# Altium PCB Copy of PCB1.PcbDoc (part 3 of 3)
Units mil, origin at the board's own origin, x right, y up, seen from the top; angles counter-clockwise.
Board outline 3937.01 x 3937.01 mil, 4 copper layers (L1, L2, L3, L4), stack 61.822 mil thick; 181 components, 253 nets, 1103 pads, 337 vias.
Unrouted connection lines stored in the file: 142.
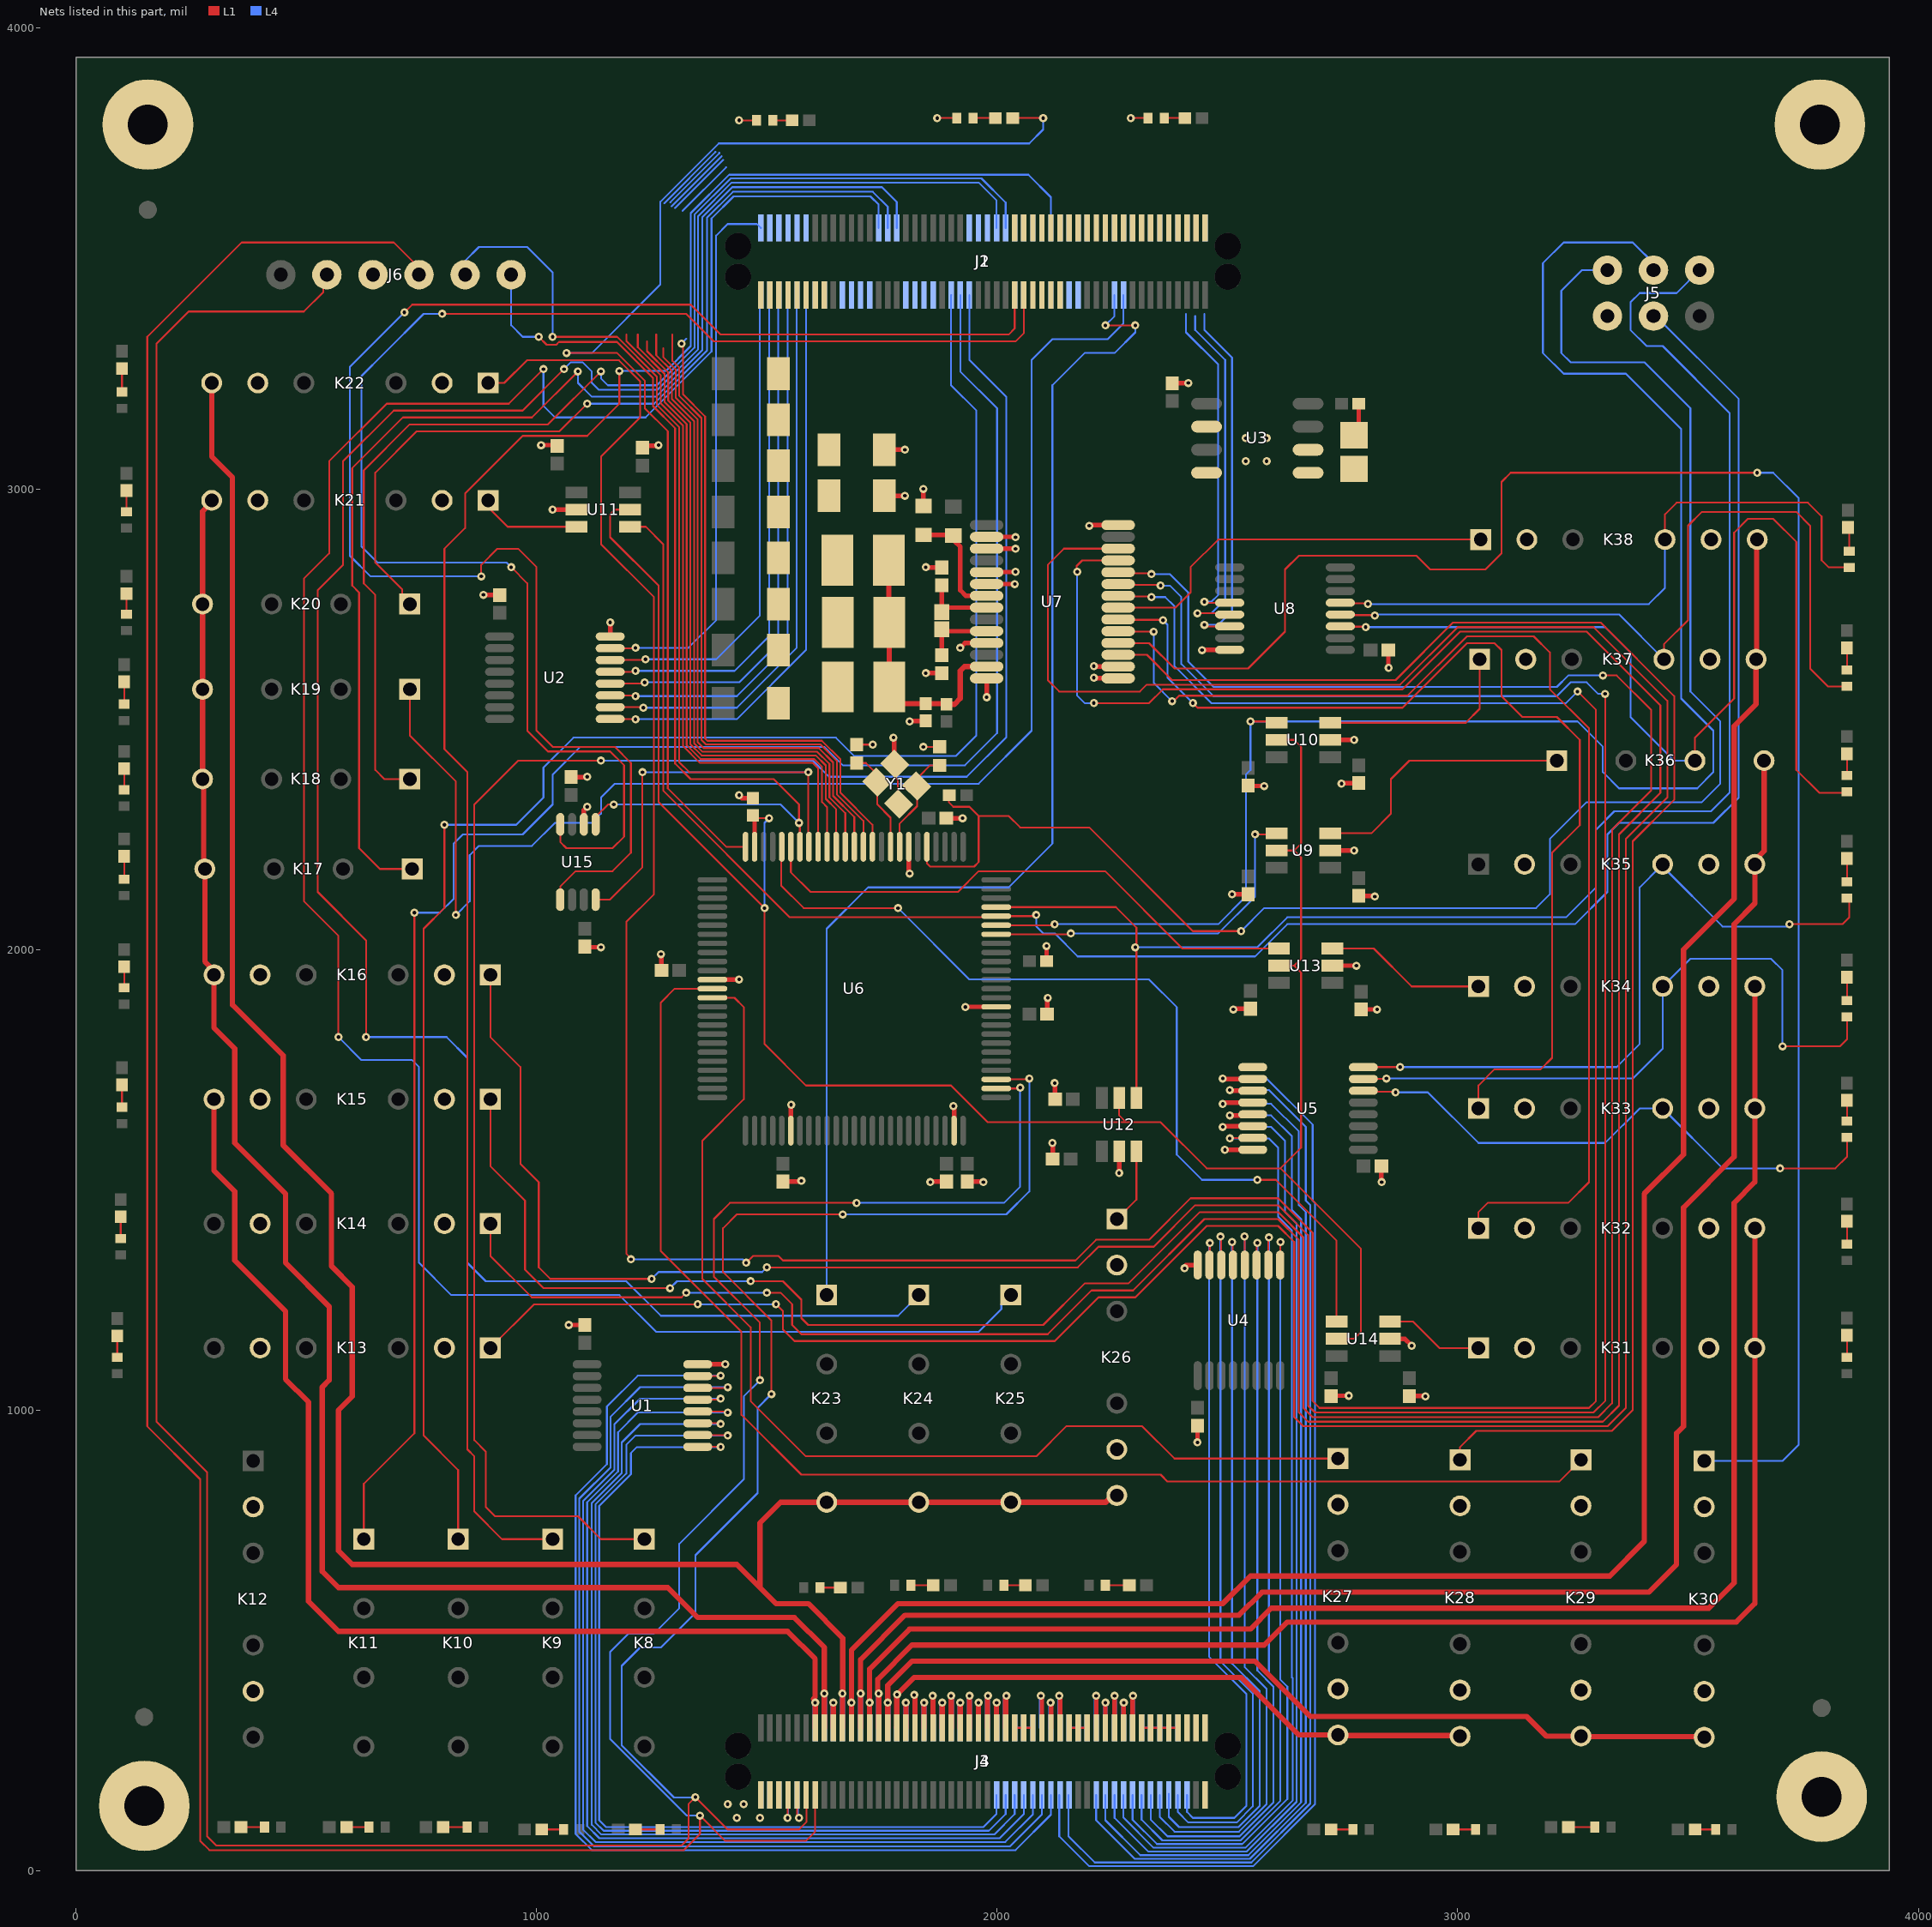
[diagram p4: the nets of this part, all layers, seen from the top]

## Via types
v1: diameter 17.72, hole 7.87, L1 to L4, 337 vias

## Nets (pads, with @x,y where several pads share a name; then routed paths per layer and width w, separated by ;. In a path a pad name is that pad's centre, name@x,y a point inside that pad or via, vN(x,y) a via of type N, cw(c..) or ccw(c..) an arc to the next point about the centre after c; other vN are vias at no path point) (continued)
COIL33: D29.1 K33.3 U5.14 | length 1234.5
  L1 w4: U5.14@2795.08,1693.39 2796.77,1691.69 2863.31,1691.69 v1(2865,1690) ; v1(3700,1525) 3820,1525 3845,1550 D29.1@3845,1592.38
  L4 w4: v1(2865,1690) 2935,1690 3045,1580 3320,1580 3395,1655 K33.3@3445,1655 3575,1525 v1(3700,1525)
COIL34: D6.1 K34.3 U5.15 | length 1467.4
  L1 w4: U5.15@2795.08,1718.98 2795.59,1719.49 2844.49,1719.49 v1(2845,1720) ; v1(3705,1790) 3830,1790 3845,1805 D6.1@3845,1853.7
  L4 w4: v1(2845,1720) 3380,1720 3445,1785 K34.3@3445,1920 3505,1980 3680,1980 3705,1955 v1(3705,1790)
COIL35: D31.1 K35.3 U5.16 | length 1552.2
  L1 w4: U5.16@2795.08,1744.57 2795.3,1744.78 2874.78,1744.78 v1(2875,1745) ; v1(3720,2055) 3835,2055 3850,2070 3850,2106.97 D31.1@3845,2111.97
  L4 w4: v1(2875,1745) 3345,1745 3395,1795 3395,2135 3440,2180 3440,2185 K35.3@3445,2185 3445,2180 3575,2050 3717.66,2050 3720,2052.34 v1(3720,2055)
COIL36: D8.1 K36.3 U8.11 | length 2297.8
  L1 w4: U8.11@2745.08,2701.61 2745.89,2700.81 2799.19,2700.81 v1(2800,2700) ; K36.3@3515,2410 3515,2460 3600,2545 3600,2905 3630,2935 3685,2935 3735,2885 3735,2390 3785,2340 3842.6,2340 D8.1@3845,2342.4
  L4 w4: v1(2800,2700) 3320,2700 3375,2645 3375,2505 3470,2410 K36.3@3515,2410
COIL37: D5.1 K37.3 U8.12 | length 1752.7
  L1 w4: U8.12@2745.08,2727.2 2746.18,2726.1 2818.9,2726.1 v1(2820,2725) ; K37.3@3447.68,2630 3447.68,2662.68 3500,2715 3500,2920 3530,2950 3735,2950 3765,2920 3765,2610 3803.92,2571.08 D5.1@3845,2571.08
  L4 w4: v1(2820,2725) 2822.68,2727.68 3350,2727.68 K37.3@3447.68,2630
COIL38: D14.1 K38.3 U8.13 | length 1404.8
  L1 w4: U8.13@2745.08,2752.8 2746.48,2751.4 2803.6,2751.4 v1(2805,2750) ; K38.3@3450,2890 3450,2945 3475,2970 3760,2970 3790,2940 3790,2845 3805.43,2829.57 D14.1@3850,2829.57
  L4 w4: v1(2805,2750) 3415,2750 3450,2785 K38.3@3450,2890
COM: J3.67 J4.68 | length 140.3
  L1 w4: v1(2135,380) v1@2136.57,378.43
  L1 w10: J3.67@2136.57,310.51 v1@2136.57,378.43
  L4 w4: v1(2135,380) v1@2135.79,379.21 ; J4.68@2135.79,311.3 J4.68@2136.57,310.51
  L4 w10: J4.68@2135.79,311.3 v1@2135.79,379.21
CS: U6.19 U9.4 | length 778.8
  L1 w4: U6.19@1998.07,2033.11 2158.11,2033.11 v1(2160,2035) ; v1(2560,2250) 2604.53,2250 U9.4@2606.93,2252.4
  L4 w4: v1(2160,2035) 2480,2035 2560,2115 v1(2560,2250)
CS1: J3.100
CS_RASP: K36.1 U9.3 | length 601.1
  L1 w4: U9.3@2723.07,2252.4 2812.4,2252.4 2855,2295 2855,2370 2895,2410 K36.1@3215,2410
D: J3.13 J4.14 K15.4 | length 2523.6
  L1 w11.55: K15.4@300,1675 300,1520 345,1475 345,1325 455,1215 455,1067.5 505,1017.5 505,585 570,520 1545,520 1604.92,460.08 1604.92,376.87 1601.53,373.47 ; v1(1605.03,365) 1605.08,364.92 J3.13@1605.08,310.51
  L4 w11.55: J4.14@1605.08,310.51 v1@1605.05,364.97
D0: K28.1 U7.3 | length 3371.1
  L1 w4: U7.3@2262.72,2639.84 2325.16,2639.84 2380,2585 2865,2585 2990,2710 3310,2710 3470,2550 3470,2325 3380,2235 3380,1000 3335,955 3040,955 3005,920 K28.1@3005,892.32
D1: K30.1 U7.4 | length 4168.3
  L1 w4: U7.4@2262.72,2665.43 2263.15,2665 2330,2665 2385,2610 2545,2610 2625,2690 2625,2825 2655,2855 2910,2855 2940,2825 3060,2825 3095,2860 3095,3015 3115,3035 v1(3650,3035)
  L4 w4: K30.1@3535,890 3705,890 3740,925 3740,2980 3685,3035 v1(3650,3035)
D2: K32.1 U7.5 | length 2625.1
  L1 w4: U7.5@2262.72,2691.02 2263.74,2690 v1(2340,2690) ; v1(2380,2539.14) 2383.34,2539.14 2395.06,2550.86 2890.86,2550.86 3020,2680 3165,2680 3200,2645 3200,2565 3285,2480 3285,1495 3240,1450 3065,1450 3045,1430 K32.1@3045,1395
  L4 w4: v1(2340,2690) 2340,2579.14 v1(2380,2539.14)
D3: K33.1 U7.6 | length 2302.3
  L1 w4: U7.6@2262.72,2716.61 2263.52,2715.81 2359.19,2715.81 v1(2360,2715) ; v1(2425,2535) 2435,2525 2880,2525 3020,2665 3080,2665 3095,2650 3095,2550 3140,2505 3215,2505 3265,2455 3265,2270 3205,2210 3205,1765 3180,1740 3080,1740 3045,1705 K33.1@3045,1655
  L4 w4: v1(2360,2715) 2370,2705 2370,2590 v1(2425,2535)
D4: K38.1 U7.7 | length 880.7
  L1 w4: U7.7@2262.72,2742.2 2387.2,2742.2 2420,2775 2420,2830 2480,2890 K38.1@3050,2890
D5: K22.1 U7.8 | length 7696.6
  L1 w4: K22.1@895,3230 930,3230 979.14,3279.14 1179.14,3279.14 1225,3233.29 1225,3155 1140,3070 1140,2880 1255,2765 1255,2120 1195,2060 1195,1340 1205,1330 v1(1205,1327.5) ; v1(1455,1320) 1470,1335 1525,1335 1535,1325 2170,1325 2215,1370 2330,1370 2420,1460 2610,1460 2685,1385 2685,1020 2700,1005 3285,1005 3300,1020 3300,2520 v1(3260,2560) ; U7.8@2262.72,2767.8 2264.11,2766.4 2333.6,2766.4 v1(2335,2765)
  L4 w4: v1(1205,1327.5) 1447.5,1327.5 v1(1455,1320) ; v1(2335,2765) 2365,2765 2385,2745 2385,2615 2465,2535 3235,2535 v1(3260,2560)
D6: K16.1 U7.9 | length 6284.4
  L1 w4: K16.1@900,1945 900,1810 965,1745 965,1535 1005,1495 1005,1310 1030,1285 v1(1250,1285) ; v1(1500,1310) 2175,1310 2220,1355 2340,1355 2430,1445 2610,1445 2675,1380 2675,1010 2690,995 3295,995 3320,1020 v1(3320,2555) ; U7.9@2262.72,2793.39 2264.41,2791.69 2353.31,2791.69 v1(2355,2790)
  L4 w4: v1(1250,1285) 1265,1300 1490,1300 v1(1500,1310) ; v1(2355,2790) 2375,2790 2400,2765 2400,2620 2470,2550 3215,2550 3245,2580 3280,2580 3305,2555 v1(3320,2555)
D7: K15.1 U7.10 | length 6291.5
  L1 w4: K15.1@900,1675 900,1530 975,1455 975,1305 1015,1265 v1(1290,1265) ; v1(1465,1280) 1535,1280 1575,1240 1575,1200 1590,1185 2100,1185 2190,1275 2285,1275 2440,1430 2610,1430 2665,1375 2665,1005 2685,985 3305,985 3335,1015 3335,2260 3420,2345 3420,2520 3345,2595 v1(3315,2595) ; U7.10@2262.72,2818.98 2264.7,2816.99 2333.01,2816.99 v1(2335,2815)
  L4 w4: v1(1290,1265) 1305,1280 v1(1465,1280) ; v1(2335,2815) 2375,2815 2415,2775 2415,2625 2470,2570 3215,2570 3240,2595 v1(3315,2595)
D8: K14.1 U7.11 | length 6482.7
  L1 w4: K14.1@900,1405 900,1335 990,1245 1315,1245 v1(1325,1255) ; v1(1500,1255) 1530,1255 1555,1230 1555,1185 1575,1165 2110,1165 2205,1260 2295,1260 2450,1415 2610,1415 2655,1370 2655,995 2675,975 3315,975 3350,1010 3350,2250 3440,2340 3440,2530 3280,2690 3005,2690 2920,2605 2880,2565 2360,2565 2330,2535 2220,2535 v1(2210,2535) ; v1(2173.86,2820) 2172.52,2821.34 2172.52,2832.52 2184.57,2844.57 U7.11@2262.72,2844.57
  L4 w4: v1(1325,1255) v1(1500,1255) ; v1(2173.86,2820) 2173.86,2551.14 2190,2535 v1(2210,2535)
D9: K13.1 U7.12 | length 6553
  L1 w4: K13.1@900,1135 995,1230 v1(1350,1230) ; v1(1520,1230) 1535,1215 1535,1175 1560,1150 2125,1150 2220,1245 2300,1245 2455,1400 2610,1400 2645,1365 2645,985 2665,965 3325,965 3365,1005 3365,2240 3455,2330 3455,2540 3295,2700 3000,2700 2875,2575 2325,2575 2310,2560 2135,2560 2110,2585 2110,2835 2145.16,2870.16 U7.12@2262.72,2870.16
  L4 w4: v1(1350,1230) v1(1520,1230)
DATA: R8.1 U6.50 | length 2752.8
  L1 w4: v1(1065,3295) 1175,3295 1235,3235 1235,3175 1285,3125 1285,2350 1411.93,2223.07 U6.50@1453.78,2223.07 ; R8.1@2035,3805 v1(2100,3805)
  L4 w4: v1(1065,3295) 1120,3295 1269,3444 1269,3623.2 1395.8,3750 2070,3750 2100,3780 v1(2100,3805)
E: J3.15 J4.16 K16.4 K17.4 K18.4 K19.4 K20.4 K21.4 | length 3861.1
  L1 w11.55: K21.4@295,2975 295,2971.37 275,2951.37 K20.4@275,2750 K19.4@275,2565 K18.4@275,2370 277.5,2367.5 277.5,2177.5 K17.4@280,2175 280,1974.13 300,1954.13 K16.4@300,1945 300,1830 345,1785 345,1580 455,1470 455,1320 550,1225 550,1065 535,1050 535,650 570,615 1285,615 1350,550 1560,550 1624.76,485.24 v1@1624.76,384.76 ; J3.15@1624.76,310.51 v1@1624.76,384.76 ; v1(1625,385) v1@1624.76,384.76
  L4 w11.55: J4.16@1624.76,310.51 1624.87,310.62 1624.87,384.87 v1(1625,385)
EXT_RX: K27.1 U6.64 | length 2392.9
  L1 w4: U6.64@1381.93,1895.31 1429.69,1895.31 1450,1875 1450,1675 1360,1585 1360,1285 1465,1180 1465,1020 1585,900 2085,900 2150,965 2315,965 2385,895 K27.1@2740,895
EXT_TX: K29.1 U6.63 | length 2994.1
  L1 w4: U6.63@1381.93,1915 1300,1915 1270,1885 1270,1345 1445,1170 1445,990 1575,860 2355,860 2370,845 3220.24,845 K29.1@3267.6,892.36
F: J3.17 J4.18 | length 109
  L1 w11.55: J3.17@1644.45,310.51 1644.45,364.45 1644.5,364.5 v1(1644.5,365)
  L4 w11.55: J4.18@1644.47,310.54 v1(1644.5,365)
G: J3.19 J4.20 K22.4 K23.4 K24.4 K25.4 K26.4 | length 5057.2
  L1 w11.55: K22.4@295,3230 295,3070 340,3025 340,1880 450,1770 450,1575 555,1470 555,1312.5 600,1267.5 600,1030 570,1000 570,695 600,665 1435,665 1485,615 ; J3.19@1664.13,310.51 1664.26,310.64 1664.13,310.77 1664.13,384.13 v1@1665,385 ; v1(1664.19,385) 1665,385.81 1665,505 1590,580 1520,580 1485,615 ; K26.4@2260,815 2250.87,815 2235.87,800 K25.4@2030,800 K24.4@1830,800 K23.4@1630,800 1530,800 1485,755 1485,615
  L4 w11.55: J4.20@1664.13,310.51 1664.24,310.62 1664.24,384.95 v1(1664.19,385)
GND: C1.1 C2.1 C3.1 C4.1 C5.1 C6.1 C7.1 C8.1 C9.1 C10.1 C11.1 C12.1 C13.1 C15.1 C16.1 C17.1 C18.1 C19.1 C20.1 C21.1 C22.1 C23.1 C24.1 C25.1 C26.1 C27.1 C28.1 C29.1 C30.1 C31.1 C32.1 D1.1 D2.1 D3.1 J1.62 J1.64 J1.66 J1.68 J2.33 J2.35 J2.37 J2.39 J3.2 J3.4 J3.6 J3.69 J3.71 J3.73 J3.85 J3.87 J3.89 J3.91 J3.93 J4.1 J4.3 J4.5 J4.70 J4.72 J4.74 J4.86 J4.88 J4.90 J4.92 J4.94 J5.6 J6.3 K12.5 K12.6 K13.5 K13.6 K14.5 K14.6 K15.5 K15.6 K16.5 K16.6 K21.5 K21.6 K22.5 K22.6 K26.5 K26.6 K27.5 K27.6 K28.5 K28.6 K29.5 K29.6 K30.5 K30.6 K31.5 K31.6 K32.5 K32.6 K33.5 K33.6 K34.5 K34.6 K35.5 K35.6 K37.5 K37.6 K38.5 K38.6 MH1.1 MH2.1 MH3.1 MH4.1 R4.1 R5.1 R6.1 R50.1 R51.1 R52.1 U1.8 U2.8 U3.2 U3.4 U3.5 U3.6 U4.8 U5.8 U6.11 U6.32 U6.62 U6.81 U6.99 U7.1 U7.2 U7.14 U7.16 U7.17 U7.19 U7.20 U7.25 U7.28 U8.8 U9.2 U10.2 U11.2 U12.2 U13.2 U14.2 U15.2 Y1.2 Y1.4 | length 3189.2
  L1 w4: C2.1@919.29,2770 C2.1@920,2769.29 ; C24.1@1043.58,3095 C24.1@1045,3093.58 ; C31.1@1105,2006.42 C31.1@1106.42,2005 ; v1@1109.29,2374.29 v1(1110,2375) ; v1(1160,2710) v1@1160.08,2709.92 ; v1(1270,1990) v1@1271.42,1988.58 ; v1@1409.57,1099.57 v1(1410,1100) ; v1(1440,2335) 1446.3,2328.7 ; v1(1440,3800) D1.1@1477.38,3800 ; v1@1552.2,1662.2 v1(1552.8,1662.8) ; v1@1573.58,1496.42 v1(1575,1497.83) ; C26.1@1695,2445.08 1695.08,2445 v1(1730,2445) ; v1(1775,2460) v1@1776.28,2458.72 ; Y1.2@1776.28,2403.72 Y1.2@1777.67,2402.33 1777.67,2374.53 1784.63,2367.57 1784.63,2317.42 Y1.4@1786.03,2316.03 ; v1@1808.11,2166.89 v1(1810,2165) ; v1(1810,2495) v1@1811.3,2496.3 ; v1(1840,2440) 1875,2440 C25.1@1875,2440.08 ; v1(1845,2830) v1@1845.71,2829.29 ; v1(1855,1495) v1@1856.42,1496.42 ; v1(1870,3805) D2.1@1912.38,3805 ; v1(1905,1660) v1@1906.54,1658.46 ; v1(1931.26,1875) v1@1931.89,1875.63 ; v1@1968.58,1496.42 v1(1970,1495) ; U7.19@1977.28,2818.98 1978.31,2820 U7.19@1978.82,2819.49 ; v1@2039.25,2895.75 v1(2040,2895) ; v1@2039.49,2819.49 v1(2040,2820) ; v1@2039.84,2870.16 v1(2040,2870) ; v1@2108.58,1893.58 v1(2110,1895) ; v1(2120,1580) v1@2120.71,1579.29 ; v1(2125,1710) v1@2125.71,1709.29 ; J3.69@2156.26,310.51 J3.71@2175.94,310.51 J3.73@2195.63,310.51 ; v1(2200,2920) v1@2201.34,2921.34 ; v1(2210,2590) v1@2210.67,2589.33 ; v1(2210,2615) v1@2210.75,2614.25 ; U7.1@2260.71,2589.33 2261.38,2590 U7.1@2262.72,2588.66 ; v1(2290,3805) D3.1@2327.38,3805 ; J3.85@2313.74,310.51 J3.87@2333.43,310.51 J3.89@2353.11,310.51 J3.91@2372.8,310.51 J3.93@2392.48,310.51 ; v1(2407.14,1308.01) 2409.77,1310.64 2409.77,1314.77 v1@2410,1315 ; v1@2414.29,3229.29 v1(2415,3230) ; v1(2445,2650) v1@2445.43,2650.43 ; v1(2512.83,1870) v1@2514.25,1871.42 ; C28.1@2545,2355.71 C28.1@2545.71,2355 ; v1(2747.83,2360) v1@2749.25,2361.42 ; v1@2818.58,2116.42 v1(2820,2115) ; v1@2834.29,1495.71 v1(2835,1495) ; v1@2849.29,2612.13 v1(2850,2611.42) ; v1@2929.29,1030.71 v1(2930,1030)
  L1 w10: v1(885,2770) C2.1@919.29,2770 ; v1(1010,3095) C24.1@1043.58,3095 ; v1(1035,2955) U11.2@1086.93,2955 ; v1(1070,1185) C1.1@1105,1185 ; C32.1@1075,2374.29 v1@1109.29,2374.29 ; U15.2@1102.8,2271.69 1102.8,2302.8 v1(1110,2310) ; C31.1@1106.42,2005 v1(1140,2005) ; U2.8@1160.08,2679.57 v1@1160.08,2709.92 ; 1245,3093.58 1263.58,3093.58 v1(1265,3095) ; C5.1@1271.42,1955 v1@1271.42,1988.58 ; U1.8@1350.08,1099.57 v1@1409.57,1099.57 ; U6.62@1381.93,1934.68 1439.68,1934.68 v1(1440,1935) ; 1446.3,2328.7 R5.1@1470,2328.7 ; C4.1@1535,1496.42 v1@1573.58,1496.42 ; U6.81@1552.2,1606.93 v1@1552.2,1662.2 ; R50.1@1755.08,2985 v1(1800,2985) ; R51.1@1755.08,3085 v1(1800,3085) ; Y1.2@1776.28,2403.72 v1@1776.28,2458.72 ; v1@1808.11,2166.89 U6.32@1808.11,2223.07 ; v1@1811.3,2496.3 R52.1@1845,2496.3 ; R4.1@1840,2962.99 v1(1840,3000) ; v1(1845,2600) C15.1@1880,2600 ; v1@1845.71,2829.29 C16.1@1880,2829.29 ; v1@1856.42,1496.42 C6.1@1890,1496.42 ; C9.1@1890,2285 v1(1925,2285) ; U6.99@1906.54,1606.93 v1@1906.54,1658.46 ; v1(1920,2655) 1930.43,2665.43 U7.25@1977.28,2665.43 ; v1@1931.89,1875.63 U6.11@1998.07,1875.63 ; C7.1@1935,1496.42 v1@1968.58,1496.42 ; v1(1977.28,2547.72) U7.28@1977.28,2588.66 ; U7.20@1977.28,2793.39 v1(2038.39,2793.39) ; U7.17@1977.28,2870.16 v1@2039.84,2870.16 ; U7.16@1977.28,2895.75 v1@2039.25,2895.75 ; U7.19@1978.82,2819.49 v1@2039.49,2819.49 ; R6.1@2107.4,1975 v1(2107.4,2007.6) ; C8.1@2108.58,1860 v1@2108.58,1893.58 ; C23.1@2120.71,1545 v1@2120.71,1579.29 ; C22.1@2125.71,1675 v1@2125.71,1709.29 ; v1@2201.34,2921.34 U7.14@2262.72,2921.34 ; v1@2210.67,2589.33 U7.1@2260.71,2589.33 ; v1@2210.75,2614.25 U7.2@2262.72,2614.25 ; v1(2265,1515) U12.2@2265,1561.93 ; C3.1@2380,3229.29 v1@2414.29,3229.29 ; v1@2410,1315 2410.08,1315.08 U4.8@2435.43,1315.08 ; v1(2435,930) C11.1@2435,966.42 ; v1@2445.43,2650.43 U8.8@2504.92,2650.43 ; v1(2494.57,1565.43) U5.8@2554.92,1565.43 ; v1(2510,2120) C27.1@2545,2120 ; v1@2514.25,1871.42 C18.1@2550,1871.42 ; C28.1@2545.71,2355 v1(2580,2355) ; U9.2@2723.07,2215 v1(2775,2215) ; U10.2@2723.07,2455 v1(2775,2455) ; U13.2@2728.07,1965 v1(2780,1965) ; C17.1@2738.58,1031.42 v1(2763.58,1031.42) ; v1@2749.25,2361.42 C29.1@2785,2361.42 ; C19.1@2785,2116.42 v1@2818.58,2116.42 ; C20.1@2790,1870 v1(2825,1870) ; v1@2834.29,1495.71 C12.1@2834.29,1530 ; v1@2849.29,2612.13 C13.1@2849.29,2650 ; U14.2@2853.07,1155 2885,1155 v1(2900,1140) ; C30.1@2895,1030.71 v1@2929.29,1030.71
  L4 w4: J4.70@2156.26,310.51 J4.72@2175.94,310.51 J4.74@2195.63,310.51 ; J4.86@2313.74,310.51 J4.88@2333.43,310.51 J4.90@2353.11,310.51 J4.92@2372.8,310.51 J4.94@2392.48,310.51
  other v1: 1435,115 1485,115 1415,145 1450,145 2540,3060 2585,3060 2540,3110 2585,3110
GPIO7: J2.13
GPIO8: J2.15
GPIO9: J2.63
GPIO10: J2.19
GPIO11: J2.21
GPIO12: J2.23
GPIO13: J2.25
GPIO15: J2.4
GPIO16: J2.6
GPIO17: J2.8
GPIO18: J2.10
GPIO19: J2.12
GPIO20: J2.48
GPIO21: J2.50
GPIO22: J2.52
GPIO23: J2.58
GPIO24: J2.60
GPIO25: J2.62
GPIO26: J2.64
GPIO35: J2.84
GPIO37: J2.88
GPIO38: J1.57 J2.90
GPIO39: J1.59 J2.92
GPIO40: J1.61 J2.94
GPIO41: J1.63 J2.96
GPIO42: J1.65
GPIO43: J1.67 J2.100
GPIO44: J1.69 J2.65
GPIO45: J1.71 J2.67
GPIO46: J1.73 J2.69
GPIO47: J1.75 J2.71
GPIO48: J1.77
GPIO49: J1.79
GPIO50: J1.81
GPIO51: J1.83
GPIO52: J1.85
GPIO53: J1.87
GPIO54: J1.89
GPIO55: J1.91
GPIO56: J1.93
GPIO57: J1.95
GPIO58: J1.97
GPIO59: J1.99
GPIO60: J1.2
GPIO61: J1.4
GPIO62: J1.6
GPIO63: J1.8
GPIO64: J1.10
GPIO65: J1.12
GPIO66: J1.14
GPIO67: J1.16
H: J3.21 J4.22 K37.4 K38.4 | length 4318.3
  L1 w11.55: J3.21@1683.82,310.51 1683.82,364.95 v1(1683.87,365) 1683.87,478.87 1785,580 2490,580 2550,640 3330,640 3405,715 3405,1470 3490,1555 3490,2000 3600,2110 3600,2485 3647.68,2532.68 K37.4@3647.68,2630 3648.84,2631.16 3648.84,2888.84 K38.4@3650,2890
  L4 w11.55: J4.22@1683.82,310.51 v1@1683.84,364.97
I: J3.23 J4.24 K35.4 K36.4 | length 3903.2
  L1 w11.55: J3.23@1703.5,310.51 v1(1703.5,385) 1703.5,458.5 1800,555 2525,555 2575,605 3415,605 3475,665 3475,950 3490,965 3490,1440 3600,1550 3600,2055 3645,2100 K35.4@3645,2185 3645,2194.13 3665,2214.13 K36.4@3665,2410
  L4 w11.55: J4.24@1703.5,310.51 v1(1703.5,385)
J: J3.25 J4.26 K33.4 K34.4 | length 3450.1
  L1 w11.55: J3.25@1723.19,310.51 1723.19,361.81 1723.14,361.86 v1(1723.14,365) 1723.14,438.14 1810,525 2550,525 2595,570 3545,570 3600,625 3600,1450 3645,1495 K33.4@3645,1655 K34.4@3645,1920
  L4 w11.55: J4.26@1723.19,310.51 v1@1723.16,364.97
K: J3.27 J4.28 K31.4 K32.4 | length 2968.8
  L1 w11.55: v1@1740.75,385 1742.87,382.87 J3.27@1742.87,310.51 ; v1(1742.77,385) 1740.75,387.02 1740.75,415.75 1815,490 2580,490 2630,540 3605,540 3645,580 K31.4@3645,1135 K32.4@3645,1395
  L4 w11.55: v1(1742.77,385) 1742.87,384.9 J4.28@1742.87,310.51
L: J3.29 J4.30 K29.4 K30.4 | length 2009.1
  L1 w11.55: J3.29@1762.56,310.51 1762.56,364.95 v1(1762.51,365) 1762.51,402.51 1815,455 2560,455 2680,335 3150,335 3192.64,292.36 K29.4@3267.6,292.36 3268.78,291.18 3533.82,291.18 K30.4@3535,290
  L4 w11.55: J4.30@1762.53,310.54 v1(1762.51,365)
M: J3.31 J4.32 K27.4 K28.4 | length 1435.5
  L1 w11.55: J3.31@1782.24,310.51 1782.24,382.24 v1(1782.76,382.76) 1820,420 2530,420 2655,295 K27.4@2740,295 2741.34,293.66 3003.66,293.66 K28.4@3005,292.32
  L4 w11.55: J4.32@1782.24,310.51 1782.37,310.64 1782.37,382.37 v1(1782.76,382.76)
MISO: J3.95 J5.1 U6.22 U12.4 | length 3547.9
  L1 w4: U6.22@1998.07,2092.17 2257.83,2092.17 2302.4,2047.6 U12.4@2302.4,1678.07
  L4 w4: v1(2300,2005) 2565,2005 2630,2070 3235,2070 3300,2135 3300,2260 3340,2300 3550,2300 3590,2340 3590,3165 3445,3310 3410,3310 3375,3345 3375,3405 3395,3425 3475,3425 J5.1@3525,3475
MISO_RASP: K26.1 U12.3 | length 164.5
  L1 w4: K26.1@2260,1415 2302.4,1457.4 U12.3@2302.4,1561.93
MOSI: J3.97 J5.4 U6.21 U11.4 | length 4453.5
  L1 w4: U11.4@1203.07,2917.6 1237.4,2917.6 1275,2880 1275,2345 1550,2070 U6.21@1995,2070 ; U6.21@1998.07,2072.48 2082.48,2072.48 v1(2085,2075)
  L4 w4: v1(2085,2075) 2085,2050 2100,2035 2125,2035 2175,1985 2560,1985 2630,2055 3255,2055 3325,2125 3325,2250 3350,2275 3555,2275 3610,2330 3610,3195 J5.4@3432.5,3372.5
MOSI_RASP: K21.1 U11.3 | length 224.5
  L1 w4: K21.1@895,2975 895,2960 937.4,2917.6 U11.3@1086.93,2917.6
N: J3.33 J4.34 | length 109
  L1 w11.55: J3.33@1801.93,310.51 1801.93,364.92 v1(1802.01,365)
  L4 w11.55: J4.34@1801.93,310.51 1801.97,310.55 v1(1802.01,365) v1(1802.01,365)
NET1: J2.32 K17.1 | length 2698.8
  L1 w4: K17.1@730,2175 660,2175 615,2220 615,2775 600,2790 600,3045 710,3155 990,3155 v1(1090,3255)
  L4 w4: v1(1090,3255) 1090,3230 1120,3200 1258.94,3200 1360,3301.06 1360,3589.75 1425.25,3655 1750,3655 1782.24,3622.76 J2.32@1782.24,3566.42
NET2: J2.56 K18.1 | length 2679.3
  L1 w4: K18.1@725,2370 670,2370 650,2390 650,2770 625,2795 625,3040 725,3140 1025,3140 v1(1140,3255)
  L4 w4: v1(1140,3255) 1140,3240 1155,3225 1261.31,3225 1343,3306.69 1343,3595.37 1421.63,3674 1966,3674 2018.46,3621.54 J2.56@2018.46,3566.42
NET3: J2.54 K24.1 | length 5023.6
  L1 w4: v1(630,1810) 630,2020 525,2125 525,2780 580,2835 580,3060 690,3170 970,3170 v1(1060,3260)
  L4 w4: v1(630,1810) 805,1810 850,1765 850,1320 890,1280 1195,1280 1270,1205 1785,1205 K24.1@1830,1250 ; v1@1060.9,3260.9 1075,3275 1100,3275 1120,3255 1120,3230 1135,3215 1262.63,3215 1351,3303.37 1351,3592.06 1423.94,3665 1960,3665 1998.78,3626.22 J2.54@1998.78,3566.42
NET4: J2.30 K20.1 | length 1909.9
  L1 w4: K20.1@725,2750 708.7,2766.3 708.7,2781.3 650,2840 650,3035 740,3125 1050,3125 v1(1110,3185)
  L4 w4: v1(1110,3185) 1255.25,3185 1370,3299.75 1370,3588.43 1426.57,3645 1730,3645 1762.56,3612.44 J2.30@1762.56,3566.42
NET5: J2.28 K25.1 | length 5109
  L1 w4: v1(570,1810) 570,2030 495,2105 495,2805 550,2860 550,3060 675,3185 940,3185 v1(1015,3260)
  L4 w4: v1(570,1810) 620,1760 730,1760 745,1745 745,1320 815,1250 1180,1250 1260,1170 1960,1170 2009.36,1219.36 2009.36,1229.36 K25.1@2030,1250 ; v1(1015,3260) 1015,3180 1040,3155 1236.57,3155 1380,3298.43 1380,3587.12 1427.88,3635 1725,3635 1742.87,3617.13 J2.28@1742.87,3566.42
NET6: J2.81 K19.1 | length 3124.8
  L1 w4: K19.1@725,2565 725,2465 825,2365 v1(825,2075)
  L4 w4: v1(825,2075) 855,2105 855,2205 875,2225 990,2225 1040,2275 1120,2275 1140,2295 1140,2330 1170,2360 1960,2360 2075,2475 2075,3280 2120,3325 2240,3325 2274.37,3359.37 J2.81@2274.37,3420.75
NET7: J2.79 K23.1 | length 2738.2
  L1 w4: v1(2235,3355) v1(2300,3355)
  L4 w4: K23.1@1630,1250 1630,2045 1720,2135 2025,2135 2120,2230 2120,3225 2190,3295 2255,3295 2300,3340 v1(2300,3355) ; v1(2235,3355) 2254.69,3374.69 J2.79@2254.69,3420.75
NetC10_2: C10.2 R1.1 | length 72.7
  L1 w4: C10.2@2775,3116.42 C10.2@2785,3126.42
  L1 w10: C10.2@2785,3126.42 R1.1@2785,3185
NetC14_1: C14.1 C16.2 U7.22 | length 159.1
  L1 w4: C14.1@1880,2732.8 C14.1@1889.41,2742.2
  L1 w10: C14.1@1880,2732.8 C16.2@1880,2790.71 ; C14.1@1889.41,2742.2 U7.22@1977.28,2742.2
NetC14_2: C14.2 C15.2 U7.24 | length 155.3
  L1 w4: C14.2@1880,2695 C14.2@1883.98,2691.02
  L1 w10: C15.2@1880,2638.58 C14.2@1880,2695 ; C14.2@1883.98,2691.02 U7.24@1977.28,2691.02
NetC25_2: C25.2 U6.33 Y1.1 | length 234.4
  L1 w4: U6.33@1788.43,2223.07 1788.43,2273.43 1826.39,2311.39 1826.39,2353.61 Y1.1@1825,2355 1825,2380 1828.56,2376.44 1831.35,2376.44 1854.83,2399.92 C25.2@1875,2399.92
NetC26_2: C26.2 U6.34 Y1.3 | length 227.1
  L1 w4: C26.2@1695,2404.92 1715.17,2404.92 1733.79,2386.3 1738.7,2386.3 Y1.3@1738.7,2363.35 1740.09,2361.96 1740.09,2314.91 1768.74,2286.26 U6.34@1768.74,2223.07
NetC33_1: C33.1 C34.1 C35.1 R41.1 R42.1 R43.1 R44.1 R45.1 R46.1 R47.1 R48.1 R50.2 R51.2
NetD1_2: D1.2 R7.2 | length 42.2
  L1 w4: D1.2@1512.82,3800 R7.2@1555,3800
NetD2_2: D2.2 R8.2 | length 48.5
  L1 w4: D2.2@1947.82,3805 R8.2@1996.3,3805
NetD3_2: D3.2 R9.2 | length 44.8
  L1 w4: D3.2@2362.82,3805 R9.2@2407.6,3805
NetD4_2: D4.2 R10.2 | length 45.9
  L1 w4: D4.2@110,2950.43 R10.2@110,2996.3
NetD5_2: D5.2 R11.2 | length 48.5
  L1 w4: D5.2@3845,2606.52 R11.2@3845,2655
NetD6_2: D6.2 R12.2 | length 50.9
  L1 w4: D6.2@3845,1889.13 R12.2@3845,1940
NetD7_2: D7.2 R13.2 | length 52.2
  L1 w4: D7.2@2235,620 R13.2@2287.17,620
NetD8_2: D8.2 R14.2 | length 47.2
  L1 w4: D8.2@3845,2377.83 R14.2@3845,2425
NetD9_2: D9.2 R15.2 | length 47.6
  L1 w4: D9.2@3845,1115 R15.2@3845,1162.6
NetD10_2: D10.2 R16.2 | length 52.2
  L1 w4: R16.2@797.4,95 D10.2@849.59,95
NetD11_2: D11.2 R17.2 | length 48.5
  L1 w4: R17.2@587.72,95 D11.2@636.2,95
NetD12_2: D12.2 R18.2 | length 48.5
  L1 w4: R18.2@2990,90 D12.2@3038.48,90
NetD13_2: D13.2 R19.2 | length 47.2
  L1 w4: R19.2@2725,90 D13.2@2772.18,90
NetD14_2: D14.2 R20.2 | length 52.4
  L1 w4: R20.2@3847.32,2916.3 3850,2913.62 D14.2@3850,2865
NetD15_2: D15.2 R21.2 | length 47.2
  L1 w4: D15.2@97.32,1372.82 R21.2@97.32,1420
NetD16_2: D16.2 R22.2 | length 57.2
  L1 w4: R22.2@3240,95 D16.2@3297.18,95
NetD17_2: D17.2 R23.2 | length 47.2
  L1 w4: R23.2@1011.42,90 D17.2@1058.58,90
NetD18_2: D18.2 R24.2 | length 53.5
  L1 w4: R24.2@1215,90 D18.2@1268.48,90
NetD19_2: D19.2 R25.2 | length 44.6
  L1 w4: R25.2@3515.43,90 D19.2@3560,90
NetD20_2: D20.2 R26.2 | length 46.3
  L1 w4: D20.2@90,1115 R26.2@90,1161.3
NetD21_2: D21.2 R27.2 | length 50.9
  L1 w4: D21.2@100,3210.43 R27.2@100,3261.3
NetD22_2: D22.2 R28.2 | length 49.8
  L1 w4: D22.2@105,2152.82 R28.2@105,2202.6
NetD23_2: D23.2 R29.2 | length 46.3
  L1 w4: D23.2@2015,620 R29.2@2061.3,620
NetD24_2: D24.2 R30.2 | length 49.6
  L1 w4: D24.2@3845,1360.43 R30.2@3845,1410
NetD25_2: D25.2 R31.2 | length 50.9
  L1 w4: R31.2@358.7,95 D25.2@409.57,95
NetD26_2: D26.2 R32.2 | length 45.9
  L1 w4: D26.2@105,1916.73 R32.2@105,1962.6
NetD27_2: D27.2 R33.2 | length 48.5
  L1 w4: D27.2@105,2532.82 R33.2@105,2581.3
NetD28_2: D28.2 R34.2 | length 45.9
  L1 w4: D28.2@105,2346.73 R34.2@105,2392.6
NetD29_2: D29.2 R35.2 | length 44.8
  L1 w4: D29.2@3845,1627.82 R35.2@3845,1672.6
NetD30_2: D30.2 R36.2 | length 48.5
  L1 w4: D30.2@100,1657.82 R36.2@100,1706.3
NetD31_2: D31.2 R37.2 | length 50.2
  L1 w4: D31.2@3845,2147.4 R37.2@3845,2197.6
NetD32_2: D32.2 R38.2 | length 44.6
  L1 w4: D32.2@1615.43,615 R38.2@1660,615
NetD33_2: D33.2 R39.2 | length 48.5
  L1 w4: D33.2@1812.82,620 R39.2@1861.3,620
NetD34_2: D34.2 R49.2 | length 44.8
  L1 w4: D34.2@110,2727.82 R49.2@110,2772.6
NetR3_1: R3.1 R4.2 U7.21 | length 248.6
  L1 w4: R3.1@1903.5,2900 R3.1@1905,2898.5 1906.97,2898.5 R3.1@1906.97,2897.4
  L1 w10: R4.2@1840,2900 R3.1@1893.5,2900 ; R3.1@1896.97,2897.4 1898.08,2897.4 1907.72,2887.76 1907.72,2886.65 1920,2874.36 1920,2780 1932.2,2767.8 U7.21@1977.28,2767.8
O: J3.35 J4.36 | length 143.8
  L1 w11.55: v1(1820,381.72) 1821.64,380.08 1821.64,356.87 ; J3.35@1821.61,310.51 1821.61,356.84
  L4 w11.55: v1(1820,381.72) 1820,380.05 1821.64,378.41 J4.36@1821.61,310.51
OE: R5.2 U6.49 U9.5 U10.5 U11.5 U12.5 U13.5 U14.5 | length 4507.9
  L1 w4: U11.5@1203.07,2955 1170,2955 1160,2945 1160,2895 1265,2790 1265,2320 v1(1495,2090) 1495,1795 1585,1705 1900,1705 1980,1625 2280,1625 ; R5.2@1470,2290 R5.2@1473.46,2286.54 ; R5.2@1470,2291.3 1476.3,2285 v1(1505,2285) ; U12.5@2265,1678.07 2265,1640 2280,1625 ; U9.5@2606.93,2215 2645,2215 ; U10.5@2606.93,2455 2645,2455 2660,2440 2660,2230 2645,2215 ; U13.5@2611.93,1965 2645,1965 ; U14.5@2736.93,1155 2775,1155 2790,1170 2790,1350 2615,1525 ; 2280,1625 2355,1625 2455,1525 2615,1525 ; 2615,1525 2660,1570 2660,1950 2645,1965 ; 2645,1965 2660,1980 2660,2200 2645,2215
  L1 w10: U6.49@1473.46,2223.07 R5.2@1473.46,2286.54
  L4 w4: v1(1495,2090) 1495,2275 v1(1505,2285)
P: J3.37 J4.38 | length 109
  L1 w11.55: v1@1841.27,363.73 v1(1841.27,365) ; J3.37@1841.3,310.51 v1@1841.3,363.7
  L4 w11.55: J4.38@1841.3,310.51 v1(1841.27,365)
Q: J3.39 J4.40 | length 139.8
  L1 w11.55: v1(1860,380) 1860.98,379.02 J3.39@1860.98,310.51
  L4 w11.55: v1(1860,380) 1860.91,379.09 1860.91,310.59 J4.40@1860.98,310.51
R: J3.41 J4.42 | length 109
  L1 w11.55: v1(1880.62,365) 1880.62,364.38 1880.67,364.33 J3.41@1880.67,310.51
  L4 w11.55: J4.42@1880.64,310.54 v1(1880.62,365)
RASP_SCL: J1.58 J2.57 U15.5 | length 3489.8
  L1 w4: v1(713.11,3383.11) 730,3400 1335,3400 1400,3335 2025,3335 2038.15,3348.15 J1.58@2038.15,3420.75 ; v1(880,2810) 880,2835 915,2870 960,2870 1000,2830 1000,2475 1035,2440 1170,2440 1205,2405 1205,2210 1165,2170 1085,2170 1051.61,2136.61 U15.5@1051.61,2108.31
  L4 w4: v1(713.11,3383.11) 595,3265 595,2855 640,2810 v1(880,2810)
RASP_SDA: J1.60 J2.59 U15.4 | length 3280.7
  L1 w4: v1(795,3380) 1325,3380 1385,3320 2040,3320 2057.83,3337.83 J1.60@2057.83,3420.75 ; v1(945,2830) 980,2795 980,2475 1025,2430 1160,2430 1190,2400 1190,2245 1165,2220 1065,2220 1051.61,2233.39 U15.4@1051.61,2271.69
  L4 w4: v1(795,3380) 755,3380 670,3295 620,3245 620,2875 655,2840 935,2840 v1(945,2830)
RELAY8: J4.95 U4.7 | length 1486.7
  L1 w4: U4.7@2461.02,1315.08 2461.54,1315.6 2461.54,1362.41 v1(2462.07,1362.93)
  L4 w4: J4.95@2412.17,164.84 2412.17,127.83 2425,115 2515,115 2541.13,141.13 2541.13,383.87 2460,465 2460,1360.87 v1(2462.07,1362.93)
RELAY9: J4.53 U1.1 | length 1998
  L1 w4: U1.1@1350.08,920.43 1399.57,920.43 v1(1400,920)
  L4 w4: v1(1400,920) 1218,920 1205,907 1205,861.06 1136,792.06 1136,110 1151,95 1970,95 1998.78,123.78 J4.53@1998.78,164.84
RELAY10: J4.55 U1.2 | length 2095.8
  L1 w4: U1.2@1350.08,946.02 1413.98,946.02 v1(1415,945)
  L4 w4: v1(1415,945) 1215,945 1195,925 1195,862.37 1128,795.37 1128,105 1146,87 1982,87 2018.46,123.46 J4.55@2018.46,164.84
RELAY11: J4.57 U1.3 | length 2125.9
  L1 w4: U1.3@1350.08,971.61 1398.39,971.61 v1(1400,970)
  L4 w4: v1(1400,970) 1225,970 1185,930 1185,863.69 1120,798.69 1120,100 1141,79 1994,79 2038.15,123.15 J4.57@2038.15,164.84
RELAY12: J4.59 U1.4 | length 2226.5
  L1 w4: U1.4@1350.08,997.2 1412.8,997.2 v1(1415,995)
  L4 w4: v1(1415,995) 1220,995 1177,952 1177,867 1110,800 1110,97.34 1136.66,70.69 2005.69,70.69 2057.83,122.83 J4.59@2057.83,164.84
RELAY13: J4.61 U1.5 | length 2267.1
  L1 w4: U1.5@1350.08,1022.8 1397.8,1022.8 v1(1400,1025)
  L4 w4: v1(1400,1025) 1225,1025 1169,969 1169,870.31 1101,802.31 1101,90 1128.31,62.69 2017.69,62.69 2077.52,122.52 J4.61@2077.52,164.84
RELAY14: J4.63 U1.6 | length 2364
  L1 w4: U1.6@1350.08,1048.39 1413.39,1048.39 v1(1415,1050)
  L4 w4: v1(1415,1050) 1225,1050 1161,986 1161,876 1093,808 1093,85 1125,53 2028,53 2097.2,122.2 J4.63@2097.2,164.84
RELAY15: J4.65 U1.7 | length 2402.9
  L1 w4: U1.7@1350.08,1073.98 1351.1,1075 1351.61,1074.49 1399.49,1074.49 v1(1400,1075)
  L4 w4: v1(1400,1075) 1220,1075 1153,1008 1153,883 1085,815 1085,80 1120,45 2040,45 2116.89,121.89 J4.65@2116.89,164.84
RELAY16: J2.11 U2.1 | length 1258
  L1 w4: U2.1@1160.08,2500.43 1214.57,2500.43 v1(1215,2500)
  L4 w4: v1(1215,2500) 1435,2500 1585,2650 J2.11@1585,3420.75
RELAY17: J2.9 U2.2 | length 1224.9
  L1 w4: U2.2@1160.08,2526.02 1231.02,2526.02 v1(1232.05,2525)
  L4 w4: v1(1232.05,2525) 1435,2525 1565,2655 J2.9@1565,3420.75
RELAY18: J2.7 U2.3 | length 1191.9
  L1 w4: U2.3@1160.08,2551.61 1213.39,2551.61 v1(1215,2550)
  L4 w4: v1(1215,2550) 1435,2550 1545,2660 J2.7@1545,3420.75
RELAY19: J2.5 U2.4 | length 1157
  L1 w4: U2.4@1160.08,2577.2 1232.2,2577.2 v1(1235,2580)
  L4 w4: v1(1235,2580) 1440,2580 1525,2665 J2.5@1525,3420.75
RELAY20: J2.3 U2.5 | length 1117.6
  L1 w4: U2.5@1160.08,2602.8 1212.8,2602.8 v1(1215,2605)
  L4 w4: v1(1215,2605) 1430,2605 1505,2680 J2.3@1505,3420.75
RELAY21: J2.1 U2.6 | length 1060.7
  L1 w4: U2.6@1160.08,2628.39 1235.16,2628.39 v1(1236.77,2630)
  L4 w4: v1(1236.77,2630) 1390,2630 1485,2725 J2.1@1485,3420.75
RELAY22: J2.2 U2.7 | length 1201.1
  L1 w4: U2.7@1160.08,2653.98 1213.98,2653.98 v1(1215,2655)
  L4 w4: v1(1215,2655) 1330,2655 1390,2715 1390,3550 1415,3575 1478.39,3575 J2.2@1486.97,3566.42
RELAY23: J4.87 U4.3 | length 1643.4
  L1 w4: U4.3@2563.39,1315.08 2563.39,1361.61 v1(2565,1363.23)
  L4 w4: J4.87@2333.43,164.84 2333.43,111.57 2370,75 2526.31,75 2600,148.69 2600,400 2565,435 v1(2565,1363.23)
RELAY24: J4.89 U4.4 | length 1632.3
  L1 w4: v1(2537.2,1377.2) 2537.8,1376.61 U4.4@2537.8,1315.08
  L4 w4: J4.89@2353.11,164.84 2353.11,116.89 2385,85 2525,85 2585,145 2585,395 2537.2,442.8 v1(2537.2,1377.2)
RELAY25: J4.91 U4.5 | length 1576.6
  L1 w4: v1(2510,1365) 2511.1,1363.9 2511.1,1318.39 2510,1317.28 U4.5@2512.2,1315.08
  L4 w4: J4.91@2372.8,167.9 2372.8,117.21 2395,95 2523.69,95 2570,141.31 2570,390 2510,450 v1(2510,1365)
RELAY26: J4.93 U4.6 | length 1551.8
  L1 w4: v1(2485,1376.77) 2486.61,1375.16 U4.6@2486.61,1315.08
  L4 w4: J4.93@2392.48,164.84 2392.48,127.52 2415,105 2520,105 2555,140 2555,385 2485,455 v1(2485,1376.77)
RELAY27: J4.85 U4.2 | length 1702.6
  L1 w4: U4.2@2588.98,1315.08 2588.98,1373.98 v1(2590,1375)
  L4 w4: J4.85@2313.74,164.84 2313.74,111.26 2358.88,66.12 2528.75,66.12 2615,152.37 2615,400 2590,425 v1(2590,1375)
RELAY28: J4.83 U4.1 | length 1717.5
  L1 w4: U4.1@2614.57,1315.08 2614.57,1364.57 v1(2615,1365)
  L4 w4: J4.83@2294.06,164.84 2294.06,110.94 2346.88,58.12 2532.06,58.12 2630,156.06 2630,400 2615,415 v1(2615,1365)
RELAY29: J4.81 U5.7 | length 2080.3
  L1 w4: v1(2505,1590) 2506.02,1591.02 U5.7@2554.92,1591.02
  L4 w4: J4.81@2274.37,164.84 2274.37,115.63 2339.88,50.12 2538.81,50.12 2642,153.31 2642,418 2640,420 2640,1390 2610,1420 2610,1570 2590,1590 v1(2505,1590)
RELAY30: J4.79 U5.6 | length 2178.1
  L1 w4: v1(2490,1615) v1@2491.61,1616.61
  L1 w10: v1@2491.61,1616.61 U5.6@2554.92,1616.61
  L4 w4: J4.79@2255,164.84 2255,115 2327.88,42.12 2542.12,42.12 2650,150 2650,1405 2625,1430 2625,1585 2595,1615 v1(2490,1615)
RELAY31: J4.77 U5.5 | length 2217.8
  L1 w4: U5.5@2552.72,1640 U5.5@2554.92,1642.2
  L1 w10: v1(2505,1640) U5.5@2552.72,1640
  L4 w4: J4.77@2235,164.84 2235,110 2310.88,34.12 2545.44,34.12 2660,148.69 2660,1415 2640,1435 2640,1595 2595,1640 v1(2505,1640)
RELAY32: J4.75 U5.4 | length 2314.6
  L1 w4: v1(2490,1665) v1@2492.8,1667.8
  L1 w10: v1@2492.8,1667.8 U5.4@2554.92,1667.8
  L4 w4: J4.75@2215,164.84 2215,110 2298.88,26.12 2548.75,26.12 2670,147.37 2670,1430 2655,1445 2655,1605 2595,1665 v1(2490,1665)
RELAY33: J4.69 U5.3 | length 2413.2
  L1 w4: v1(2505,1695) v1@2506.61,1693.39
  L1 w10: v1@2506.61,1693.39 U5.3@2554.92,1693.39
  L4 w4: J4.69@2155,164.84 2155,75 2211.88,18.12 2552.06,18.12 2680,146.06 2680,1445 2670,1455 2670,1615 2590,1695 v1(2505,1695)
RELAY34: J4.67 U5.2 | length 2506.6
  L1 w4: v1(2490,1720) v1@2491.02,1718.98
  L1 w10: v1@2491.02,1718.98 U5.2@2554.92,1718.98
  L4 w4: J4.67@2135,164.84 2135,75 2199.88,10.12 2555.38,10.12 2690,144.75 2690,1450 2685,1455 2685,1620 2585,1720 v1(2490,1720)
RELAY35: U5.1
RELAY36: U8.6 | length 798.6
  L1 w4: v1(2450,2705) 2453.39,2701.61 U8.6@2504.92,2701.61
  L4 w4: v1(2450,2705) 2480,2705 2510,2735 2510,3285 2450,3345 2450,3380
RELAY37: U8.5 | length 785.4
  L1 w4: v1(2435,2730) 2502.13,2730 U8.5@2504.92,2727.2
  L4 w4: 2430,3375 2430,3345 2495,3280 2495,2760 2465,2730 v1(2435,2730)
RELAY38: U8.4 | length 731
  L1 w4: v1(2450,2755) 2452.2,2752.8 U8.4@2504.92,2752.8
  L4 w4: 2410,3380 2410,3340 2480,3270 2480,2770 2465,2755 v1(2450,2755)
RESET: J5.5 R2.1 U6.30 | length 3690
  L1 w4: U6.30@1847.48,2223.07 1847.48,2187.52 1855,2180 1950,2180 1960,2190 1960,2290 ; R2.1@1896.3,2335 1895,2333.7 1895,2320 1905,2310 1940,2310 1960,2290 ; v1(2530,2040) 2425,2040 2200,2265 2050,2265 2025,2290 1960,2290
  L4 w4: v1(2530,2040) 2580,2090 3170,2090 3200,2120 3200,2240 3280,2320 3530,2320 3570,2360 3570,2495 3505,2560 3505,3175 3405,3275 3245,3275 3225,3295 3225,3430 3270,3475 J5.5@3325,3475
S: J3.43 J4.44 | length 139.3
  L1 w11.55: v1(1900,380) 1900.35,379.65 J3.43@1900.35,310.51
  L4 w11.55: v1(1900,380) 1900.25,379.75 1900.25,310.62 J4.44@1900.35,310.51
SCK: J3.99 J5.3 U6.20 U10.4 | length 3743.3
  L1 w4: U6.20@1998.07,2052.8 2122.8,2052.8 v1(2125,2055) ; v1(2550,2495) 2604.33,2495 U10.4@2606.93,2492.4
  L4 w4: v1(2125,2055) 2480,2055 2540,2115 2540,2380 2550,2390 v1(2550,2495) 3260,2495 3315,2440 3315,2385 3350,2350 3520,2350 3555,2385 3555,2475 3485,2545 3485,3130 3365,3250 3230,3250 3185,3295 3185,3490 3230,3535 3380,3535 J5.3@3430,3485
SCK_RASP: K37.1 U10.3 | length 444.5
  L1 w4: U10.3@2723.07,2492.4 3017.4,2492.4 3047.68,2522.68 K37.1@3047.68,2630
SCL: J3.8 J4.7 | length 100.5
  L1 w4: v1(1545,115) 1545.51,115.51 1545.51,164.33 J3.8@1546.02,164.84
  L4 w4: v1(1545,115) 1546.02,116.02 J4.7@1546.02,164.84
SDA: J3.10 J4.9 | length 103.2
  L1 w4: J3.10@1565.71,164.84 1565.71,119.29 v1(1570,115)
  L4 w4: J4.9@1565.71,164.84 1567.85,162.7 1567.85,117.15 v1(1570,115)
SEL0: J2.82 U6.42 | length 1585.5
  L1 w4: 1195,3335 1195,3321.31 1270,3246.31 1270,3185.25 1318,3137.25 1318,2573 1318,2442 1355,2405 1600,2405 1611.26,2393.74 U6.42@1611.26,2223.07
  L4 w4: 1277,3619.88 1388.44,3731.32
SEL1: J2.80 U6.41 | length 1578.2
  L1 w4: 1220,3335 1220,3307.63 1278,3249.63 1278,3188.57 1326,3140.57 1326,2444 1356.66,2413.34 1602.97,2413.34 1620,2396.31 1620,2320 1630.94,2309.06 U6.41@1630.94,2223.07
  L4 w4: 1290.66,3622.23 1396.85,3728.42 1396.85,3730
SEL2: J2.78 U6.40 | length 1565.9
  L1 w4: 1240,3320 1240,3315 1240,3298.94 1286,3252.94 1286,3191.88 1334,3143.88 1334,2446 1358.66,2421.34 1606.28,2421.34 1628,2399.63 1628,2327 1650.63,2304.37 U6.40@1650.63,2223.07
  L4 w4: 1293,3613.25 1401.75,3722
SEL3: J2.74 U6.39 | length 1574.9
  L1 w4: 1260,3335 1260,3290.25 1294,3256.25 1294,3195.2 1342,3147.2 1342,2448 1360.66,2429.34 1609.6,2429.34 1636,2402.94 1636,2330.31 1670.32,2296 U6.39@1670.32,2223.07
  L4 w4: 1301,3609.94 1405.06,3714
SEL4: J2.72 U6.38 | length 1400.4
  L1 w4: 1275,3305 1275,3286.57 1302,3259.57 1302,3198.51 1350,3150.51 1350,2450 1362.66,2437.34 1612.91,2437.34 1644,2406.25 1644,2333.63 1690,2287.63 U6.38@1690,2223.07
SEL5: J2.70 U6.37 | length 1563.2
  L1 w4: 1295,3335 1295,3277.88 1310,3262.88 1310,3201.82 1358,3153.82 1358,2455 1367.66,2445.34 1616.23,2445.34 1652,2409.57 1652,2336.94 1709.69,2279.26 U6.37@1709.69,2223.07
  L4 w4: 1317,3603.31 1411.69,3698
SEL6: J2.68 U6.36 | length 1426.6
  L1 w4: v1(1315,3315) 1318,3312 1318,3205.14 1366,3157.14 1366,2458.31 1370.97,2453.34 1619.54,2453.34 1660,2412.88 1660,2340.25 1729.37,2270.88 U6.36@1729.37,2223.07
  L4 w4: v1(1315,3315) 1315,3316.01 1325,3326.01 ; J2.68@2135,3567.99 J2.68@2136.57,3566.42
SLAVE_RX: U6.45 U13.4 | length 1220.8
  L1 w4: U6.45@1552.2,2223.07 1552.2,2167.8 1595,2125 1915,2125 1960,2170 2234.74,2170 2402.34,2002.4 U13.4@2611.93,2002.4
SLAVE_RX_RASP: K34.1 U13.3 | length 351.1
  L1 w4: U13.3@2728.07,2002.4 2817.6,2002.4 2900,1920 K34.1@3045,1920
SLAVE_SCL: J6.5 U6.43 U15.8 | length 2663.2
  L1 w4: v1(1035,3330) 1175,3330 1261,3244 1261,3182.94 1310,3133.94 1310,2406.31 1331.31,2385 v1(1590,2385) 1590,2224.65 U6.43@1591.57,2223.07 ; U15.8@1128.39,2108.31 1159.49,2108.31 1230,2178.82 v1(1230,2385)
  L4 w4: J6.5@845,3465 845,3495 875,3525 980,3525 1035,3470 v1(1035,3330) ; v1(1230,2385) v1(1590,2385)
SLAVE_SDA: J6.6 U6.44 U15.1 | length 2211.2
  L1 w4: v1(1005,3330) 1022,3313 1043,3313 1048.86,3318.86 1174.83,3318.86 1253,3240.69 1253,3179.63 1301,3131.63 1301,2404 1335,2370 1515,2370 1570,2315 v1(1570,2275) 1571.89,2273.11 U6.44@1571.89,2223.07 ; U15.1@1128.39,2271.69 1128.39,2288.39 1128.86,2288.39 1155.47,2315 v1(1167.74,2315)
  L4 w4: J6.6@945,3465 945,3355 970,3330 v1(1005,3330) ; v1(1167.74,2315) 1530,2315 v1(1570,2275)
SLAVE_TX: U6.46 U14.4 | length 1972.9
  L1 w4: U6.46@1532.52,2223.07 1531.26,2221.81 1531.26,2138.74 1580,2090 v1(1785,2090) ; v1(2565,1500) 2605,1500 2736.93,1368.07 U14.4@2736.93,1192.4
  L4 w4: v1(1785,2090) 1940,1935 2330,1935 2390,1875 2390,1555 2445,1500 v1(2565,1500)
SLAVE_TX_RASP: K31.1 U14.3 | length 215.7
  L1 w4: U14.3@2853.07,1192.4 2902.6,1192.4 2960,1135 K31.1@3045,1135
T: J3.45 J4.46 | length 109
  L1 w11.55: v1(1920,365) v1(1920,365) J3.45@1920.04,310.51
  L4 w11.55: J4.46@1920.04,310.51 v1(1920,365)
U: J3.47 J4.48 | length 139.2
  L1 w11.55: J3.47@1939.72,310.51 1939.72,379.72 v1(1940,380)
  L4 w11.55: J4.48@1939.72,310.51 1939.83,310.62 1939.83,379.83 v1(1940,380)
VETB_RX: J3.14 J6.4 U6.2 | length 8096.5
  L1 w4: J6.4@745,3465 745,3480 690,3535 360,3535 155,3330 155,965 270,850 270,65 290,45 1320,45 1355,80 v1(1355,120) 1410,65 1585,65 1605.08,85.08 J3.14@1605.08,164.84 ; v1(1485,1065) 1485,1190 1385,1290 1385,1415 1420,1450 v1(1695,1450) ; U6.2@1998.07,1698.46 2048.46,1698.46 v1(2050,1700)
  L4 w4: v1(1355,120) 1326.26,120 1160,286.26 1160,475 1200,515 1255,515 1310,570 1310,710 1450,850 1450,1030 v1(1485,1065) ; v1(1695,1450) 2015,1450 2050,1485 v1(2050,1700)
VETB_TX: J3.12 J6.2 U6.3 | length 7776.7
  L1 w4: J6.2@545,3465 537.11,3457.11 537.11,3427.11 495,3385 245,3385 175,3315 175,975 285,865 285,75 305,55 1315,55 1330,70 1330,145 v1(1345,160) 1415,90 1570,90 1585.86,105.86 1585.86,164.38 J3.12@1585.39,164.84 ; v1(1510,1035) 1510,1195 1405,1300 1405,1395 1435,1425 v1(1665,1425) ; U6.3@1998.07,1718.15 2068.15,1718.15 v1(2070,1720)
  L4 w4: v1(1345,160) 1344.14,159.14 1298.43,159.14 1185,272.57 1185,445 1225,485 1270,485 1345,560 1345,685 1480,820 1480,1005 v1(1510,1035) ; v1(1665,1425) 2020,1425 2070,1475 v1(2070,1720)
VIN1: C33.2 C34.2 C35.2 R40.1 R52.2 U7.27 | length 573.5
  L1 w4: C34.2@1765,2711.1 C34.2@1766.1,2710 ; C33.2@1766.1,2570 1766.1,2566.15 C33.2@1798.55,2533.7 ; R40.1@1888.7,2533.7 R40.1@1890,2532.4
  L1 w11.55: C34.2@1765,2711.1 C35.2@1765,2845 ; C33.2@1766.1,2570 C34.2@1766.1,2710 ; C33.2@1798.55,2533.7 R52.2@1845,2533.7 R40.1@1888.7,2533.7 ; R40.1@1890,2532.4 1907.4,2532.4 1920,2545 1920,2605 1929.25,2614.25 U7.27@1977.28,2614.25
VOUT1: J2.43 K10.1 | length 3885.9
  L1 w4: v1(800,2270.93) 800,2090 755,2045 755,945 830,870 K10.1@830,720
  L4 w4: v1(800,2270.93) 955.92,2270.93 1015,2330 1015,2395 1080,2460 1650,2460 1690,2420 1910,2420 1955,2465 1955,3170 1900,3225 1900,3420.39 J2.43@1900.35,3420.75
VOUT2: J2.45 K11.1 | length 3957.5
  L1 w4: K11.1@625,720 625,840 735,950 v1(735,2080)
  L4 w4: v1(735,2080) 790,2080 820,2110 820,2230 840,2250 970,2250 1035,2315 1035,2380 1095,2440 1625,2440 1665,2400 1930,2400 2000,2470 2000,3175 1920.04,3254.96 J2.45@1920.04,3420.75
VOUT3: J2.47 K8.1 | length 4145.9
  L1 w4: v1(1140,2410) 960,2410 865,2315 865,935 890,910 890,790 910,770 1090,770 1140,720 K8.1@1234.02,720
  L4 w4: v1(1140,2410) 1600,2410 1635,2375 1934.03,2375 2020,2460.97 2020,3200 1939.72,3280.28 J2.47@1939.72,3420.75
VOUT4: J2.66 K9.1 | length 4306.5
  L1 w4: K9.1@1035,720 925,720 865,780 865,900 850,915 850,2385 800,2435 800,2870 845,2915 845,2990 970,3115 1110,3115 1180,3185 v1(1180,3255.86)
  L4 w4: v1(1180,3255.86) 1280.86,3255.86 1335,3310 1335,3598.69 1418.31,3682 2068,3682 2116.89,3633.11 J2.66@2116.89,3566.42
W: J3.49 J4.50 | length 109
  L1 w11.55: J3.49@1959.41,310.51 1959.41,364.41 1959.46,364.46 v1(1959.46,365)
  L4 w11.55: J4.50@1959.41,310.51 v1@1959.44,364.97
X: J3.51 J4.52 | length 139.7
  L1 w11.55: J3.51@1979.09,310.51 1979.09,379.09 v1(1980,380)
  L4 w11.55: J4.52@1979.09,310.51 1979.2,310.62 1979.2,379.2 v1(1980,380)
X1: J3.57 J3.59 J3.61 J4.58 J4.60 J4.62 | length 78.7
  L1 w4: J3.57@2038.15,310.51 J3.59@2057.83,310.51 J3.61@2077.52,310.51
  L4 w4: J4.58@2038.15,310.51 J4.60@2057.83,310.51 J4.62@2077.52,310.51
X2: J3.63 J4.64 | length 140.8
  L1 w4: v1(2095,380) v1@2097.2,377.8
  L1 w10: J3.63@2097.2,310.51 v1@2097.2,377.8
  L4 w10: v1(2095,380) 2096.1,378.9 2096.1,311.61 J4.64@2097.2,310.51
X3: J3.65 J4.66 | length 109.7
  L1 w4: v1(2116.06,365) 2116.06,363.94 v1@2116.89,363.11
  L1 w10: J3.65@2116.89,310.51 v1@2116.89,363.11
  L4 w4: v1(2116.06,365) v1@2116.48,364.59 ; J4.66@2116.48,310.93 J4.66@2116.89,310.51
  L4 w10: J4.66@2116.48,310.93 v1@2116.48,364.59
X4: J3.75 J4.76 | length 139.2
  L1 w4: v1(2215,380) v1@2215.32,379.69
  L1 w10: J3.75@2215.32,310.51 v1@2215.32,379.69
  L4 w4: v1(2215,380) v1@2215.16,379.84 ; J4.76@2215.16,310.67 J4.76@2215.32,310.51
  L4 w10: J4.76@2215.16,310.67 v1@2215.16,379.84
X5: J3.77 J4.78 | length 109
  L1 w10: J3.77@2235,310.51 v1(2235,365)
  L4 w10: J4.78@2235,310.51 v1(2235,365)
X6: J3.79 J4.80 | length 139.2
  L1 w4: v1@2254.69,379.69 v1(2255,380)
  L1 w10: J3.79@2254.69,310.51 v1@2254.69,379.69
  L4 w4: J4.80@2254.69,310.51 J4.80@2254.84,310.67 ; v1@2254.84,379.84 v1(2255,380)
  L4 w10: J4.80@2254.84,310.67 v1@2254.84,379.84
X7: J3.81 J4.82 | length 109.5
  L1 w4: v1@2274.37,364.37 v1(2275,365)
  L1 w10: J3.81@2274.37,310.51 v1@2274.37,364.37
  L4 w4: J4.82@2274.37,310.51 J4.82@2274.68,310.83 ; v1@2274.68,364.69 v1(2275,365)
  L4 w10: J4.82@2274.68,310.83 v1@2274.68,364.69
X8: J3.83 J4.84 | length 139.8
  L1 w4: v1@2294.06,379.06 v1(2295,380)
  L1 w10: J3.83@2294.06,310.51 v1@2294.06,379.06
  L4 w4: J4.84@2294.06,310.51 J4.84@2294.53,310.98 ; v1@2294.53,379.53 v1(2295,380)
  L4 w10: J4.84@2294.53,310.98 v1@2294.53,379.53
Y: J3.53 J4.54 | length 109
  L1 w11.55: J3.53@1998.78,310.51 1998.78,364.95 v1(1998.83,365)
  L4 w11.55: J4.54@1998.78,310.51 v1(1998.83,365)
Z: J3.55 J4.56 | length 140.2
  L1 w11.55: J3.55@2018.46,310.51 2018.46,378.46 v1(2020,380)
  L4 w11.55: J4.56@2018.46,310.51 2018.46,376.8 2020,378.33 v1(2020,380)
pads on no net: FD1.0 FD2.0 FD3.0 J1. J1.1 J1.3 J1.5 J1.7 J1.9 J1.11 J1.13 J1.15 J1.17 J1.19 J1.20 J1.21 J1.22 J1.23 J1.24 J1.25 J1.26 J1.27 J1.28 J1.29 J1.30 J1.31 J1.32 J1.33 J1.34 J1.35 J1.36 J1.37 J1.39 J1.41 J1.42 J1.43 J1.44 J1.45 J1.46 J1.47 J1.48 J1.49 J1.50 J1.51 J1.52 J1.53 J1.54 J1.55 J1.70 J1.72 J1.74 J1.76 J1.78 J1.80 J1.82 J1.84 J1.86 J1.88 J1.90 J1.92 J1.94 J1.96 J1.98 J1.100 J2. J2.14 J2.16 J2.17 J2.18 J2.20 J2.22 J2.24 J2.26 J2.27 J2.29 J2.31 J2.34 J2.36 J2.38 J2.40 J2.41 J2.42 J2.44 J2.46 J2.49 J2.51 J2.73 J2.75 J2.76 J2.77 J2.83 J2.85 J2.86 J2.87 J2.89 J2.91 J2.93 J2.95 J2.97 J2.98 J3. J3.16 J3.18 J3.20 J3.22 J3.24 J3.26 J3.28 J3.30 J3.32 J3.34 J3.36 J3.38 J3.40 J3.42 J3.44 J3.46 J3.48 J3.50 J3.52 J3.54 J3.56 J3.58 J3.60 J3.62 J3.64 J3.66 J3.68 J3.70 J3.72 J3.74 J3.76 J3.78 J3.80 J3.82 J3.84 J3.86 J3.88 J3.90 J3.92 J3.94 J3.96 J3.98 J4. J4.11 J4.13 J4.15 J4.17 J4.19 J4.21 J4.23 J4.25 J4.27 J4.29 J4.31 J4.33 J4.35 J4.37 J4.39 J4.41 J4.43 J4.45 J4.47 J4.49 J4.51 J4.71 J4.73 J4.96 J4.97 J4.98 J4.99 J4.100 U6.1 U6.4 U6.5 U6.6 U6.7 U6.8 U6.9 U6.12 U6.13 U6.14 U6.15 U6.17 U6.18 U6.23 U6.24 U6.25 U6.26 U6.27 U6.28 U6.29 U6.35 U6.48 U6.51 U6.52 U6.53 U6.54 U6.55 U6.56 U6.57 U6.58 U6.59 U6.60 U6.65 U6.66 U6.67 U6.68 U6.69 U6.70 U6.71 U6.72 U6.73 U6.74 U6.75 U6.76 U6.77 U6.78 U6.79 U6.82 U6.83 U6.84 U6.85 U6.86 U6.87 U6.88 U6.89 U6.90 U6.91 U6.92 U6.93 U6.94 U6.95 U6.96 U6.97 U7.13 U7.26 U8.1 U8.2 U8.3 U8.7 U8.10 U8.14 U8.15 U8.16
copper on no net: | length 2739.6
  L4 w4: v1(1195,3335) 1195,3350 1277,3432 1277,3619.88 ; v1(1220,3335) 1220,3350 1285,3415 1285,3616.57 ; v1(1240,3315) 1240,3345 1293,3398 ; v1(1260,3335) 1260,3337.31 1301,3378.31 ; 1309,3606.63 1408.37,3706 ; 1397.33,3740 2180,3740 2275,3645 ; 1404.85,3730 2160,3730 2255,3635

## Polygon pours and split planes (outlines as drawn)
GND on L1 "GND_L01_P011" (solid, pour order 11): 1380,225 1380,100 1535,100 1535,225
NetC33_1 on L1 "NETC33_1_L01_P009" (solid, pour order 9): 1480,3305 1480,3295 1480,2475 1705,2475 1710,2480 1710,2935 1695,2950 1695,3140 1665,3170 1605,3170 1590,3185 1590,3305
GND on L1 "GND_L01_P008" (solid, pour order 8): 2405,3160 2405,2995 2405,2990 2420,2990 2825,2990 2825,3155 2825,3160
GND on L1 "GND_L01_P006" (solid, pour order 6): 2305,400 2305,235 2400,235 2400,240 2400,400
GND on L1 "GND_L01_P004" (solid, pour order 4): 2150,400 2150,230 2205,230 2205,400
X1 on L1 "X1_L01_P002" (solid, pour order 2): 2030,395 2030,230 2085,230 2085,395
+5V on L1 "+5V_L01_P000" (solid, pour order 0): 1480,400 1480,225 1535,225 1535,230 1535,235 1535,400
GND on L4 "GND_L04_P010" (solid, pour order 10): 1380,225 1380,95 1535,95 1535,225
GND on L4 "GND_L04_P007" (solid, pour order 7): 2305,400 2305,235 2400,235 2400,400
GND on L4 "GND_L04_P005" (solid, pour order 5): 2150,400 2150,230 2205,230 2205,400
X1 on L4 "X1_L04_P003" (solid, pour order 3): 2030,395 2030,230 2085,230 2085,395
+5V on L4 "+5V_L04_P001" (solid, pour order 1): 1480,400 1480,225 1535,225 1535,400
GND on L2 (split plane): 3917.16,20.35 20.35,20.35 20.35,3917.16 3917.16,3917.16

## Silkscreen, mask and mechanical layers (free items; w line width, h text height)
Top Overlay:
  text "R" at 2866.46,3850.06 h472.44 r180
  text "DEBUG" at 1315,3830 h60 r180
  text "PROGRAMMER" at 3231.11,3827.8 h60 r180
  text "COMMAND" at 2170,3775 h60 r180
  text "POWER" at 2545,3775 h60 r180
  text "ALARM" at 1671.73,3770.28 h60 r180
  text "e" at 3081.09,3716.09 h236.22 r180
  text "b" at 3085,3616.9 h393.7 r180
  text "W" at 2855,3515 h236.22 r180
  text "VETB" at 2280,3310 h78.74 r180
  text "ionosens" at 3625,3265 h98.43 r180
  text "UNED" at 3445,3145 h98.43 r180
  text "VETB" at 2220,3130 h98.43 r180
Mechanical 1:
  lines w0.5: 0.25,0.25 3937.26,0.25 3937.26,3937.26 0.25,3937.26 ; 0.25,5.25 0.25,3942.26